# Altium PCB Pixy2Carrier.PcbDoc
Units mil, origin at the board's own origin, x right, y up, seen from the top; angles counter-clockwise.
Board outline 1680 x 2175.5 mil, 2 copper layers (Top Layer, Bottom Layer), stack 62.8 mil thick; 16 components, 16 nets, 75 pads, 4 vias.
Unrouted connection lines stored in the file: 1.
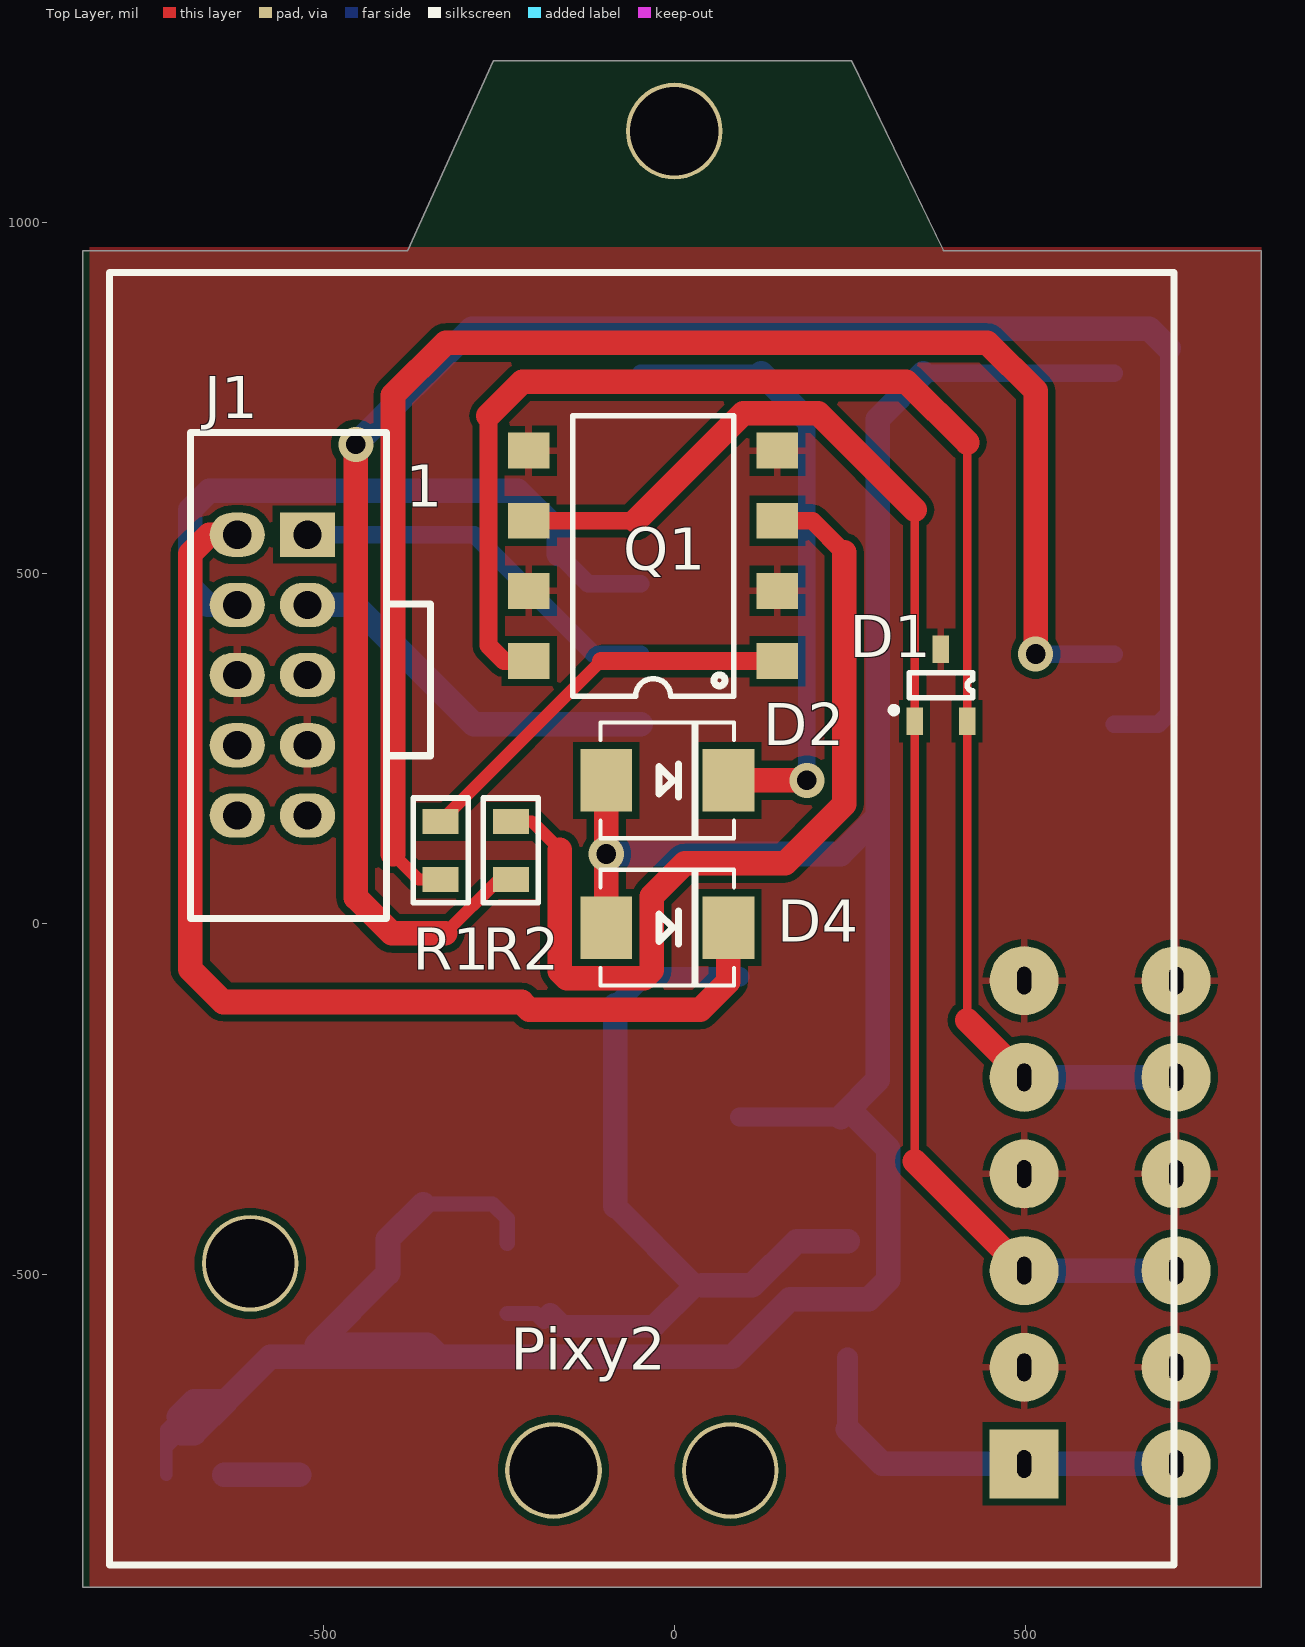
[diagram p0: Top Layer view]
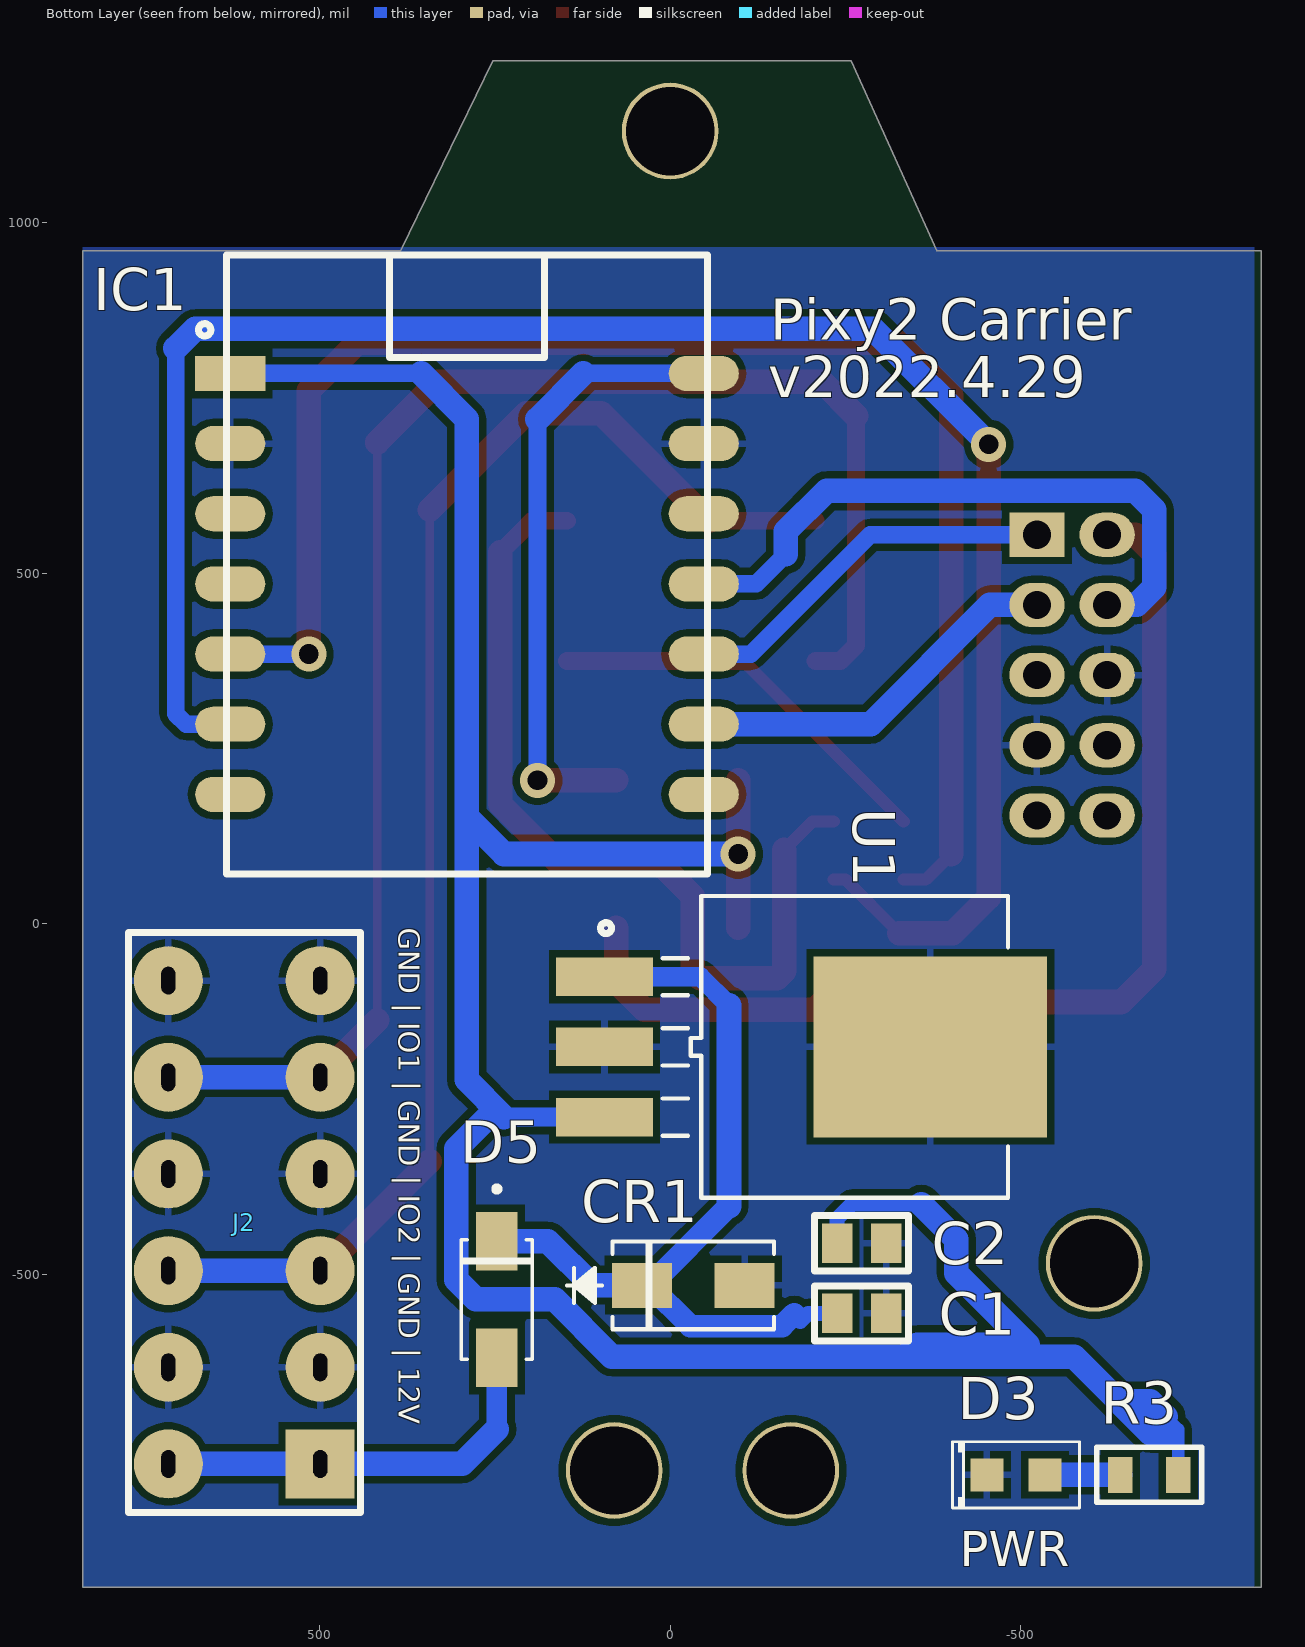
[diagram p1: Bottom Layer view, seen from below]
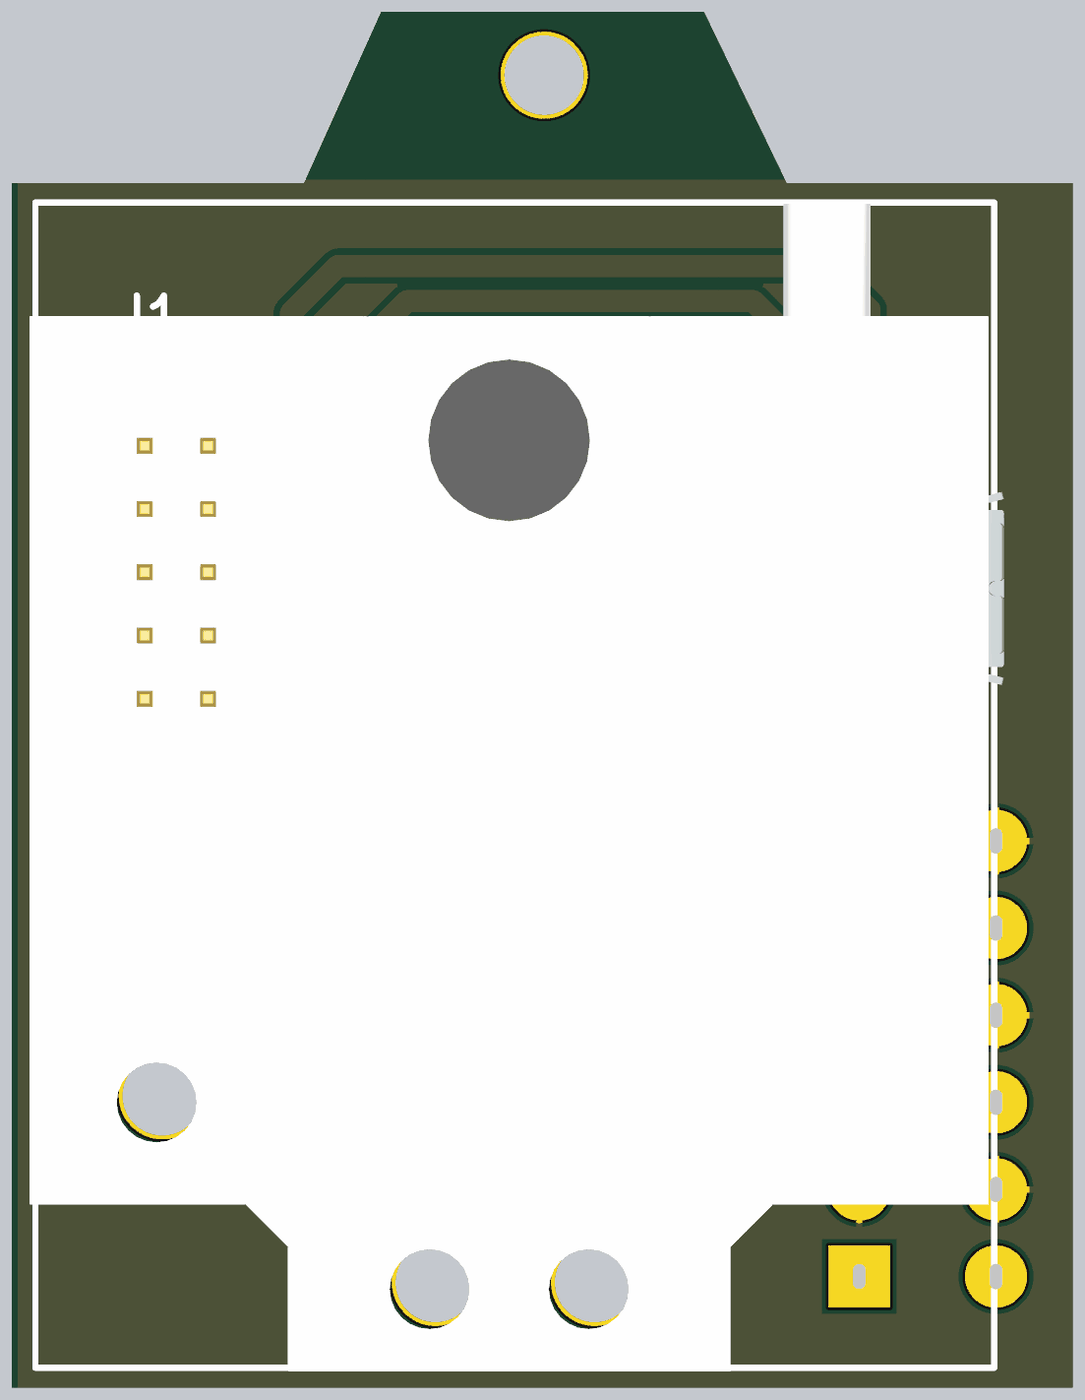
[diagram p2: 3D render of the assembled board from above, using the file's embedded part models]
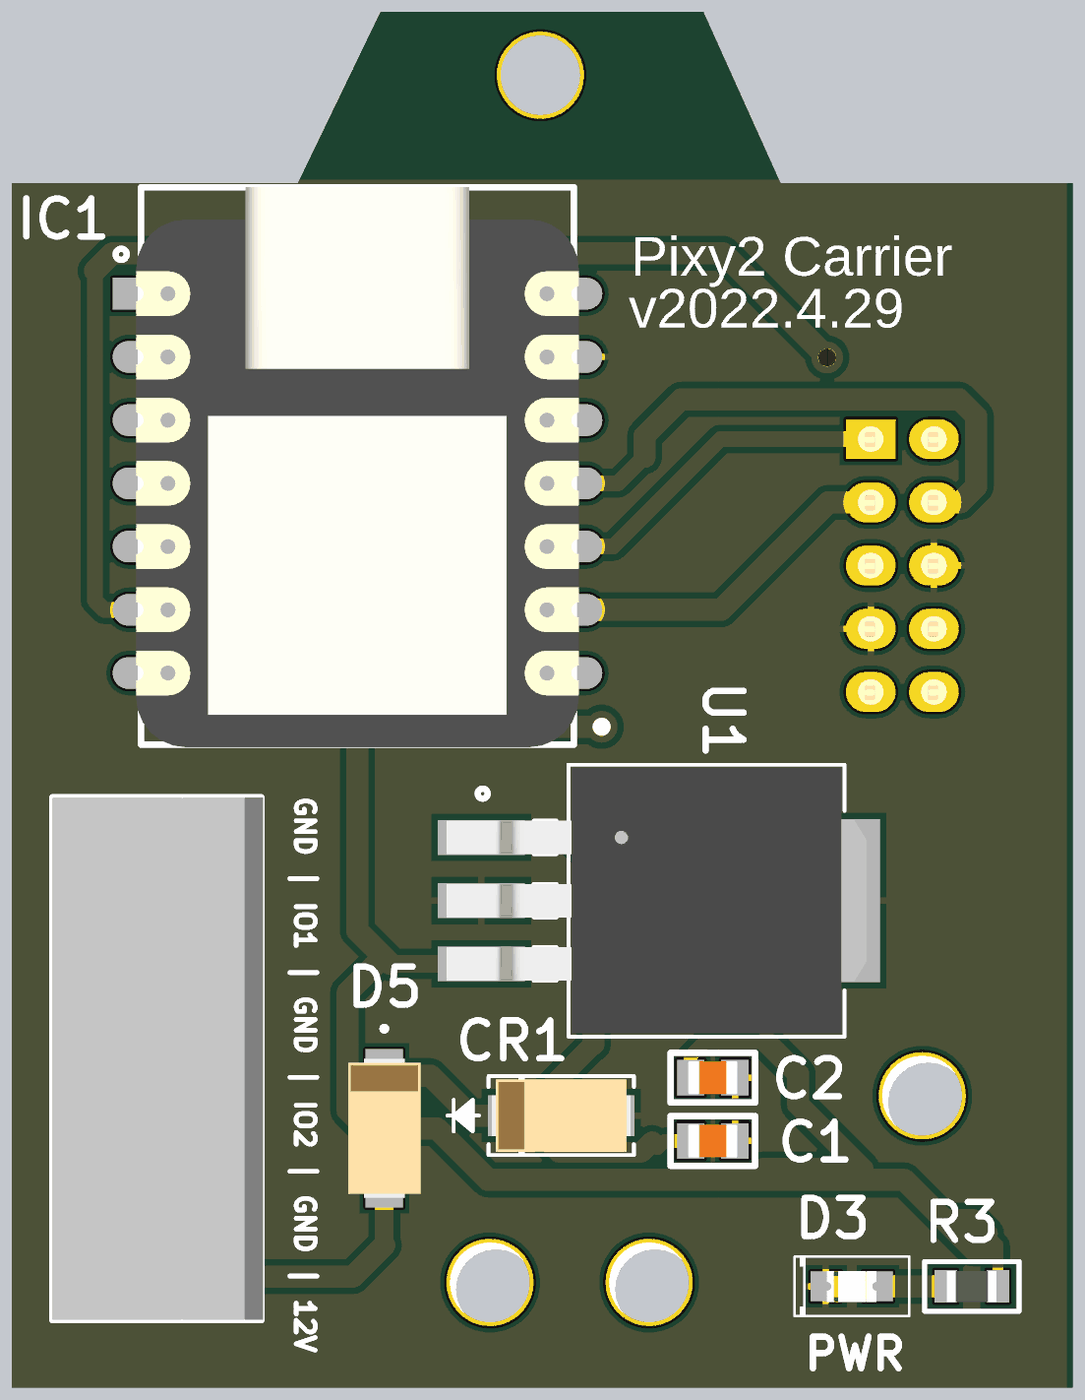
[diagram p3: 3D render of the assembled board from below, using the file's embedded part models]

## Layer stack, top to bottom
Top Solder: solder mask 1, Solder Resist, Dk 3.5
Top Layer: signal copper 1.4
Dielectric 1: dielectric 60, FR-4, Dk 4.8
Bottom Layer: signal copper 1.4
Bottom Solder: solder mask 1, Solder Resist, Dk 3.5

## Board outline
-380,959.5 -258.04,1230 253.04,1230 383.72,959.5 837,959.5 837,-945.5 -843,-945.5 -843,959.5

## Design rules (kind name [scope] priority, off if disabled: settings)
Clearance [All] p1: gap=10 ignorepadtopadclearanceinfootprint=FALSE except(0: Arc-Hole Track-Hole SMDPad-Hole THPad-Hole Via-Hole Fill-Hole Poly-Hole Region-Hole Text-Hole)
PolygonConnect [All] p1: connectstyle=Relief reliefconductorwidth=10 reliefentries=4 polygonreliefangle="90 Angle" airgapwidth=10
RoomDefinition Pixy2Carrier [InComponentClass('Pixy2Carrier')] p1: confinementstyle=ConfineIn formatcopy=TRUE lockcomponents=FALSE outline -833,-955.5 837,-955.5 837,964.5 -833,964.5
RoutingVias [All] p1: holewidth=28 width=50 viastyle="Through Hole" minholewidth=28 minwidth=50 maxholewidth=28 maxwidth=50
SMDNeckDown [All] p1: percent=50.000
SolderMaskExpansion [All] p1: expansion=4 istentingtop=FALSE
Width [All] p1: maxlimit=50 minlimit=10 preferedwidth=35 minimp=50.000000 maximp=50.000000 favimp=50.000000
30 further rules are at their usual default settings.

## Components (designator, comment, footprint, x,y, rotation, side; value= is the part's Value field where it differs from the comment)
C1 "CL21A106KOQNNNG" CAPC2012X140N -273,-555.5 r180 bottom
C2 "CL21A106KOQNNNG" CAPC2012X140N -273,-455.5 r180 bottom
CR1 "SMAZ15-13-F" SMA_DIO -33,-515.5 r180 bottom
D1 "D1213A-02SOL-7" SOT23-3 380,340 r180 top
D2 "LSM115JE3/TR13" DO-214BA_MCH -10,204.5 r180 top
D3 "LTST-C171KGKT" DIOC200X125X110 -493,-785.5 r180 bottom
D4 "LSM115JE3/TR13" DO-214BA_MCH -10,-5.5 r180 top
D5 "SK34A" DIOM4325X250N 247,-535.5 r270 bottom
IC1 "ADAFRUITQTPYSAMD21" ADAFRUITQTPYSAMD21 289.5,484.5 r180 bottom
J1 "PIXY2" PIXY2 -523,554.5 r0 top locked
J2 "AST2130602" AST2130602 607,-425.5 r0 bottom
Q1 "LTV-827S-TA1" LTV-827S-TA1 147,374.5 r180 top
R1 "100" RMCF0805FT -333,104.5 r90 top
R2 "100" RMCF0805FT -233,104.5 r90 top
R3 "150" RMCF0805FT -683,-785.5 r180 bottom
U1 "MIC29310-5.0WU" TO-263-3_MCL -263,-175.5 r270 bottom

## Footprints (in the part's own frame and the unit in brackets; to place one, negate y for a bottom-side part, rotate by r counter-clockwise, add the part's x,y. Pads: shape width x height; smd on the part's side, far side on the other; paste and mask are expansions set on the pad)
ADAFRUITQTPYSAMD21 [mil]
  rect 100x50 smd: 1(-337.5,300)
  oval 100x50 smd: 2(-337.5,200) 3(-337.5,100) 4(-337.5,0) 5(-337.5,-100) 6(-337.5,-200) 7(-337.5,-300) 8(337.5,-300) 9(337.5,-200) 10(337.5,-100) 11(337.5,0) 12(337.5,100) 13(337.5,200) 14(337.5,300)
  silkscreen extent -383,-413 343,469, body extent -350,-417 350,469, height 169
AST2130602 [mm]
  rect 2.5x2.5 hole 0.509 slot 1 at 90 deg: 1(-2.75,8.75)
  round 2.5 hole 0.509 slot 1 at 90 deg: 1(2.75,8.75) 2(-2.75,5.25) 2(2.75,5.25) 3(-2.75,1.75) 3(2.75,1.75) 4(-2.75,-1.75) 4(2.75,-1.75) 5(-2.75,-5.25) 5(2.75,-5.25) 6(-2.75,-8.75) 6(2.75,-8.75)
  silkscreen extent -4.2,-10.5 4.2,10.5, body extent -4.28,-10.5 4.22,10.5, height 14.21
CAPC2012X140N [mm]
  rect 1.1x1.43 smd: 1(-0.888,0) 2(0.888,0)
  silkscreen extent -1.7,-1 1.7,1, body extent -1,-0.67 1,0.67, height 1.26
DIOC200X125X110 [mm]
  rect 1.2x1.2 smd: NEG(-1.05,0) POS(1.05,0)
  silkscreen extent -2.3,-1.2 2.3,1.2, body extent -1,-0.63 1,0.63, height 0.9
DIOM4325X250N [mm]
  rect 2.12x1.5 smd: A(2.115,0) C(-2.115,0)
  silkscreen extent -4.1,-1.28 2.16,1.28, body extent -2.8,-1.46 2.8,1.46, height 2.35
DO-214BA_MCH [mil]
  rect 74x89 smd paste+0 mask+0: 1(-87,0) 2(87,0)
  silkscreen extent -95,-83 95,83, body extent -103,-51 103,51, height 117
LTV-827S-TA1 [mm]
  rect 1.5x1.3 smd: 1(0,0) 2(0,-2.54) 3(0,-5.08) 4(0,-7.62) 5(9,-7.62) 6(9,-5.08) 7(9,-2.54) 8(9,0)
  silkscreen extent 1.59,-8.89 7.42,1.27, body extent -0.53,-8.68 9.52,1.06, height 4.26
PIXY2 [mm]
  rect 2x1.6 hole 1.02: 1(0,0)
  oval 2x1.6 hole 1.02: 2(-2.54,0) 3(0,-2.54) 4(-2.54,-2.54) 5(0,-5.08) 6(-2.54,-5.08) 7(0,-7.62) 8(-2.54,-7.62) 9(0,-10.16) 10(-2.54,-10.16)
  round 3.5 hole 3.2: 11(-2.07,-26.38) 12(8.91,-33.88) 13(15.31,-33.88)
  silkscreen extent -7.17,-37.3 31.38,9.5, body extent -7.4,-37.45 31.77,9.45, height 15.31
RMCF0805FT [mm]
  rect 0.9x1.3 smd: 1(-1.05,0) 2(1.05,0)
  silkscreen extent -1.9,-1 1.9,1, body extent -1,-0.63 1,0.63, height 0.66
SMA_DIO [mm]
  rect 2.18x1.63 smd paste+0 mask+0: 1(-1.857,0) 2(1.857,0)
  silkscreen extent -4.57,-1.59 2.92,1.59, body extent -2.8,-1.46 2.8,1.46, height 2.35
SOT23-3 [mm] "SOT23-3"
  rect 0.6x1 smd: 1(0.95,1.3) 2(-0.95,1.3) 3(0,-1.3)
  silkscreen extent -1.15,-0.45 1.8,1, body extent -1.45,-1.4 1.45,1.4, height 1.3
TO-263-3_MCL [mil]
  rect 55x138 smd paste+0 mask+0: 1(-100,-356.5) 2(0,-356.5) 3(100,-356.5)
  rect 258x333 smd paste+0 mask+0: 4(0,108)
  silkscreen extent -215,-362 215,219, body extent -210,-411 210,254, height 181

## Part data
C1 C2: "10ÂµF Â±10% 16V Ceramic Capacitor X5R 0805 _2012 Metric_", Package="0805 Samsung", Digi-Key_Part_Number=1276-6455-1-ND, Digi-Key_Purchase_URL=https://www.digikey.com/product-detail/en/samsung-electro-mechanics/CL21A106KOQNNNG/1276-6455-1-ND/5958083?utm_source=snapeda&utm_medium=aggregator&utm_campaign=symbol, MF="Samsung Electro-Mechanics", MP=CL21A106KOQNNNG, SnapEDA_Link=https://www.snapeda.com/parts/CL21A106KOQNNNG/Samsung%20Electro-Mechanics/view-part/3597829/?ref=snap
CR1: "No Description Available", Mfr_Name="Diodes Inc", Copyright="Copyright (C) 2022 Ultra Librarian. All rights reserved.", Digi-Key_Part_Number_1=SMAZ15-FDICT-ND, Digi-Key_Part_Number_2=SMAZ15-FDIDKR-ND, Digi-Key_Part_Number_3=SMAZ15-FDITR-ND, Manufacturer_Part_Number=SMAZ15-13-F, RefDes=RefDes, Type=DEV
D1: "2 Channel 6 V 0.85 pF Surface Mount TVS Diode Array - SOT-23", Breakdown Voltage=6V, Capacitance=1.2pF, Case/Package=SOT-23, Clamping Voltage=10V, Leakage Current=1uA, Manufacturer=Diodes, Max Operating Temperature=150°C, Max Power Dissipation=300mW, Max Surge Current=5A, Min Operating Temperature=-65°C, Package Quantity=3000, Peak Pulse Current=1A, Power Line Protection=Yes, Reverse Standoff Voltage=3.3V, Supplier Part Number 1=D1213A-02SOL-7DITR-ND, Test Current=1mA, Category="TVS Diodes", ComponentLink1Description=https://datasheet.ciiva.com/12326/d1213a-02sol-219080-12326802.pdf?src-supplier=Mouser, ComponentLink1URL=https://datasheet.ciiva.com/12326/d1213a-02sol-219080-12326802.pdf?src-supplier=Mouser, ComponentLink2Description=https://datasheet.ciiva.com/6574/d1213a-02sol-6574184.pdf?src-supplier=Digi-Key, ComponentLink2URL=https://datasheet.ciiva.com/6574/d1213a-02sol-6574184.pdf?src-supplier=Digi-Key, ComponentLink3Description=https://datasheet.ciiva.com/15186/getdatasheetpartid-670825-15186721.pdf?src-supplier=Verical, ComponentLink3URL=https://datasheet.ciiva.com/15186/getdatasheetpartid-670825-15186721.pdf?src-supplier=Verical, ComponentLink4Description=https://datasheet.ciiva.com/30478/0900766b8115c333-30478825.pdf?src-supplier=RSComponents, ComponentLink4URL=https://datasheet.ciiva.com/30478/0900766b8115c333-30478825.pdf?src-supplier=RSComponents, Contact Plating=Tin,Matte, Depth=1.3mm, Direction=Unidirectional, Element Configuration=Dual, ESD Protection=Yes, Height=1.1mm, Lead Free="Lead Free", Length=2.9mm, Manufacturer Part Number=D1213A-02SOL-7, Max Reverse Leakage Current=1uA, Min Breakdown Voltage=6V, Mount="Surface Mount", Number of Bidirectional Channels=2, Number of Channels=2, Number of Pins=3, Packaging="Tape and Reel", Polarity=Unidirectional, Pricing 1="3000=0.08910, 6000=0.08415, 15000=0.07673, 30000=0.07515 (USD)", Radiation Hardening=No, REACH SVHC="No SVHC", RoHS=Yes, Series=-, Stock 1=50803, Supplier 1=Digi-Key, Termination=SMD/SMT, Width=1.4mm, Working Voltage=3.3V
D2 D4: "No Description Available", Mfr_Name=Microchip, Copyright="Copyright (C) 2022 Ultra Librarian. All rights reserved.", Digi-Key_Part_Number_1=LSM115JE3/TR13TR-ND, Digi-Key_Part_Number_2=LSM115JE3/TR13CT-ND, Digi-Key_Part_Number_3=LSM115JE3/TR13DKR-ND, Manufacturer_Part_Number=LSM115JE3/TR13, RefDes=RefDes, Type=DEV
D3: "Green 2 x 1.25 x 1.1 mm 130Â° Water Clear 35 mcd 2 V Surface Mount LED", Package=None, Availability=Unavailable, MF="{'manufacturer': u'Lite-On Inc.'}", MP=LTST-C171KGKT, Price=None
D5: Package=None, Availability=Unavailable, MP=SK34A, Price=None
J1: "Female, 5 C, Straight, .100\"CC; 3.20mm Tail, No Mounting; PBT, Phos. Bronze, 105 C", Color=Black, Manufacturer=Sullins, Manufacturer Part Number=PPPC051LFBN-RC, Package Quantity=1000, Supplier Part Number 1=S9194-ND, Category=Connectors, ComponentLink1Description=https://media.digikey.com/pdf/Data%20Sheets/Sullins%20PDFs/Female_Headers.100_DS.pdf?src-supplier=Digi-Key, ComponentLink1URL=https://media.digikey.com/pdf/Data%20Sheets/Sullins%20PDFs/Female_Headers.100_DS.pdf?src-supplier=Digi-Key, ComponentLink2Description=http://www.sullinscorp.com/catalogs/78_Page80-81_HEADER_.100_2.54mm_FEMALE.pdf?src-supplier=Future+Electronics, ComponentLink2URL=http://www.sullinscorp.com/catalogs/78_Page80-81_HEADER_.100_2.54mm_FEMALE.pdf?src-supplier=Future+Electronics, Connector Type=Header, Contact Material=Bronze, Contact Plating=Gold, Contact Type="Female Socket", Height=8.5mm, Housing Material=Plastic, Lead Free="Lead Free", Length=13.2mm, Mount="Through Hole", Number of Positions=5, Number of Rows=1, Packaging=Bulk, Pitch=0.1inch, Pricing 1="1=0.49000, 10=0.42700, 80=0.35188, 440=0.30600, 1000=0.25245, 5000=0.22185, 10000=0.22100 (USD)", RoHS=Yes, RoHS Compliant=Yes, Stock 1=84206, Supplier 1=Digi-Key, Termination=Solder, Width=2.5mm
J2: "Conn PC Terminal Block 6 POS 3.5mm Solder ST Thru-Hole 6A/Contact Box/Carton", Contact Current Rating=6A, Manufacturer="METZ CONNECT USA Inc.", Supplier Part Number 1=1849-1039-ND, Approvals=UL, Category="Terminal Blocks", ComponentLink1Description=https://www.digikey.com/en/products/detail/metz-connect-usa-inc/AST2130602/7794804, ComponentLink1URL=https://www.digikey.com/en/products/detail/metz-connect-usa-inc/AST2130602/7794804, Connector Type=Receptacle,Connector, Contact Plating=Tin,Lead, Lead Free="Lead Free", Manufacturer Part Number=AST2130602, Number of Pins=6, Packaging=Box, Pricing 1="1=1.42000, 10=1.00100, 25=0.93320, 50=0.84700, 100=0.84320, 250=0.71200, 500=0.67454, 1000=0.59959, 5000=0.49966 (USD)", RoHS=No, Sealable="No (Without)", Stock 1=4797, Supplier 1=Digi-Key, Termination="Through Hole", Wire/Cable Gauge=14AWG
Q1: "LTV Series Dual Channel 35 V 5000 Vrms Transistor Output Optocoupler SMT - DIP-8", Case/Package=SMD/SMT, Collector Emitter Saturation Voltage=200mV, Collector Emitter Voltage (VCEO)=35V, Current Transfer Ratio=600%, Forward Current=50mA, Forward Voltage=1.4V, Isolation Voltage=5kV, Manufacturer="Vishay Lite-On", Max Operating Temperature=110°C, Max Power Dissipation=200mW, Min Operating Temperature=-30°C, Package Quantity=1000, Reverse Breakdown Voltage=6V, Supplier Part Number 1=160-2040-1-ND, Category=Optocouplers, Collector-emitter Voltage-Max=200mV, ComponentLink1Description=https://datasheet.ciiva.com/15119/getdatasheetpartid-293602-15119006.pdf?src-supplier=Verical, ComponentLink1URL=https://datasheet.ciiva.com/15119/getdatasheetpartid-293602-15119006.pdf?src-supplier=Verical, ComponentLink2Description=https://datasheet.ciiva.com/6578/s-110-ltv-817827847m-s-s-ta-s-ta1-s-tpseries-6578486.pdf?src-supplier=Digi-Key, ComponentLink2URL=https://datasheet.ciiva.com/6578/s-110-ltv-817827847m-s-s-ta-s-ta1-s-tpseries-6578486.pdf?src-supplier=Digi-Key, ComponentLink3Description=https://datasheet.ciiva.com/6578/s-110-ltv-817827847m-s-s-ta-s-ta1-s-tpseries-6578487.pdf?src-supplier=Digi-Key, ComponentLink3URL=https://datasheet.ciiva.com/6578/s-110-ltv-817827847m-s-s-ta-s-ta1-s-tpseries-6578487.pdf?src-supplier=Digi-Key, ComponentLink4Description=https://datasheet.ciiva.com/6578/s-110-ltv-817827847m-s-s-ta-s-ta1-s-tpseries-6578488.pdf?src-supplier=Digi-Key, ComponentLink4URL=https://datasheet.ciiva.com/6578/s-110-ltv-817827847m-s-s-ta-s-ta1-s-tpseries-6578488.pdf?src-supplier=Digi-Key, ComponentLink5Description=https://datasheet.ciiva.com/12241/ltv-817-827-847-12241821.pdf?src-supplier=Mouser, ComponentLink5URL=https://datasheet.ciiva.com/12241/ltv-817-827-847-12241821.pdf?src-supplier=Mouser, ComponentLink6Description=https://datasheet.ciiva.com/16448/ltv-817-827-847-16448540.pdf?src-supplier=Future+Electronics, ComponentLink6URL=https://datasheet.ciiva.com/16448/ltv-817-827-847-16448540.pdf?src-supplier=Future+Electronics, Fall Time=18000ns, Input Type=DC, Isolation Voltage-Max=5kV, Lead Free="Lead Free", Manufacturer Part Number=LTV-827S-TA1, Max Collector Current=50mA, Max Input Current=50mA, Max Output Voltage=35V, Mount="Surface Mount", Number of Channels=2, Number of Circuits=2, Number of Elements=2, Number of Pins=8, Output Current per Channel=50mA, Output Voltage=35V, Packaging="Tape and Reel", Power Dissipation=200mW, Pricing 1="1=0.54000, 10=0.35400, 100=0.23440 (USD)", Radiation Hardening=No, Rise Time=18000ns, RoHS=Yes, RoHS Compliant=Yes, Series=-, Stock 1=113, Supplier 1=Digi-Key
R1 R2: library part RMCF0805FT100R, "Res Thick Film 0805 100 Ohm 1% 0.125W ±100ppm/°C Molded SMD Paper T/R", Case Code (Imperial)=0805, Case Code (Metric)=2012, Manufacturer="Stackpole Electronics", Max Operating Temperature=155°C, Max Power Dissipation=125mW, Min Operating Temperature=-55°C, Power Rating=250mW, Resistance=100R, Resistor Type="Thick Film", Supplier Part Number 1=RMCF0805FT100RCT-ND, Temperature Coefficient=100ppm/°C, Tolerance=1%, Case/Package=0805, Category="Chip SMD Resistors", ComponentLink1Description=http://components.arrow.com/part/dataview/44988339S7171742N1174?src-supplier=Arrow+Electronics, ComponentLink1URL=http://components.arrow.com/part/dataview/44988339S7171742N1174?src-supplier=Arrow+Electronics, ComponentLink2Description=https://www.seielect.com/catalog/SEI-Packaging.pdf?src-supplier=Digi-Key, ComponentLink2URL=https://www.seielect.com/catalog/SEI-Packaging.pdf?src-supplier=Digi-Key, ComponentLink3Description=https://www.seielect.com/catalog/SEI-RMCF_RMCP.pdf?src-supplier=Avnet, ComponentLink3URL=https://www.seielect.com/catalog/SEI-RMCF_RMCP.pdf?src-supplier=Avnet, ComponentLink4Description=https://www.verical.com/server-webapp/html/getDatasheet?partID=359908&src-supplier=Verical, ComponentLink4URL=https://www.verical.com/server-webapp/html/getDatasheet?partID=359908&src-supplier=Verical, ComponentLink5Description=http://www.seielect.com/Catalog/SEI-RMC.pdf?src-supplier=Future+Electronics, ComponentLink5URL=http://www.seielect.com/Catalog/SEI-RMC.pdf?src-supplier=Future+Electronics, Construction=Rectangular, Contact Plating=Tin,Matte, Depth=1.25mm, Features="Automotive AEC-Q200", Height=0.026inch, Lead Free="Lead Free", Length=2mm, Manufacturer Part Number=RMCF0805FT100R, Military Standard=Not, Mount="Surface Mount", Number of Terminations=2, Packaging="Tape and Reel", Pricing 1="1=0.10000, 10=0.02700, 100=0.01090, 1000=0.00488, 2500=0.00423 (USD)", Radiation Hardening=No, RoHS=Yes, RoHS Compliant=Yes, Series=RMCF, Size Code=0805, Stock 1=188, Supplier 1=Digi-Key, Width=0.049inch
R3: library part RMCF0805FT150R, "Res Thick Film 0805 150 Ohm 1% 0.125W(1/8W) ±100ppm/C Pad SMD Automotive T/R", Case Code (Imperial)=0805, Case Code (Metric)=2012, Manufacturer="Stackpole Electronics", Max Operating Temperature=155°C, Max Power Dissipation=125mW, Min Operating Temperature=-55°C, Resistance=150R, Resistor Type="Thick Film", Temperature Coefficient=100ppm/°C, Tolerance=1%, Case/Package=0805, Category="Chip SMD Resistors", ComponentLink1Description=http://components.arrow.com/part/dataview/44988385S7171757N1174?src-supplier=Arrow+Electronics, ComponentLink1URL=http://components.arrow.com/part/dataview/44988385S7171757N1174?src-supplier=Arrow+Electronics, ComponentLink2Description=https://www.seielect.com/catalog/SEI-Packaging.pdf?src-supplier=Digi-Key, ComponentLink2URL=https://www.seielect.com/catalog/SEI-Packaging.pdf?src-supplier=Digi-Key, ComponentLink3Description=https://www.seielect.com/catalog/SEI-RMCF_RMCP.pdf?src-supplier=Avnet, ComponentLink3URL=https://www.seielect.com/catalog/SEI-RMCF_RMCP.pdf?src-supplier=Avnet, ComponentLink4Description=https://www.seielect.com/catalog/SEI-RMCF_RMCP.pdf?src-supplier=Avnet+Asia, ComponentLink4URL=https://www.seielect.com/catalog/SEI-RMCF_RMCP.pdf?src-supplier=Avnet+Asia, ComponentLink5Description=https://www.verical.com/server-webapp/html/getDatasheet?partID=375102&src-supplier=Verical, ComponentLink5URL=https://www.verical.com/server-webapp/html/getDatasheet?partID=375102&src-supplier=Verical, Construction=Rectangular, Contact Plating=Tin,Matte, Depth=1.25mm, Features="Automotive AEC-Q200", Height=0.026inch, Length=2mm, Manufacturer Part Number=RMCF0805FT150R, Military Standard=Not, Mount="Surface Mount", Number of Terminations=2, Packaging="Tape and Reel", Power Rating=125mW, Pricing 1="5000=0.00256, 10000=0.00252, 20000=0.00245, 30000=0.00239, 40000=0.00230, 50000=0.00225, 500000=0.00220 (USD)", Radiation Hardening=No, RoHS=Yes, RoHS Compliant=Yes, Series=RMCF, Stock 1=315000, Supplier 1=Avnet, Supplier Part Number 1=RMCF0805FT150R, Width=0.049inch
U1: "No Description Available", Mfr_Name=Micrel, Copyright="Copyright (C) 2022 Ultra Librarian. All rights reserved.", Digi-Key_Part_Number_1=576-2230-ND, Digi-Key_Part_Number_2=MIC29310-5.0WU-CRL-ND, Manufacturer_Part_Number=MIC29310-5.0WU, RefDes=RefDes, Type=DEV

## Free pads (board coordinates)
  round 137.8 hole 125.98: ""(0,1130)

## Via types
v1: diameter 50, hole 28, Top Layer to Bottom Layer, tented both sides, 4 vias

## Nets (pads, with @x,y where several pads share a name; then routed paths per layer and width w, separated by ;. In a path a pad name is that pad's centre, name@x,y a point inside that pad or via, vN(x,y) a via of type N, cw(c..) or ccw(c..) an arc to the next point about the centre after c; other vN are vias at no path point)
+5V: C2.1 D2.2 D4.2 IC1.1 R3.2 U1.3 | length 4322.3
  Top Layer w35: D4.2 v1(-97,99.5) D2.2
  Bottom Layer w17.72: R3.2 -724.34,-747.51 ; -706.51,-702.67 -724.34,-720.5 -724.34,-747.51 ; -703,-726.18 -724.34,-747.51
  Bottom Layer w21.65: -358,-399.5 -259.04,-399.5 -238.04,-420.5 C2.1
  Bottom Layer w25: 355,784.5 IC1.1
  Bottom Layer w27.5: U1.3 237,-275.5 260,-275.5
  Bottom Layer w35: -706.51,-702.67 -684.34,-680.5 -639,-680.5 -684.68,-726.18 -703,-726.18 ; -639.37,-680.5 -576.04,-617.17 -334.98,-617.17 ; -358,-399.5 -408.12,-449.62 -408.12,-498.12 -510,-600 -352.15,-600 -334.98,-617.17 ; v1(-97,99.5) 237,99.5 290,152.5 ; 237,-275.5 290,-222.5 290,152.5 ; 260,-275.5 305,-320.5 305,-507.5 277,-535.5 164.5,-535.5 82.83,-617.17 -334.98,-617.17 ; 355,784.5 290,719.5 290,152.5
+12V: D5.A J2.1 | length 590.5
  Bottom Layer w29.53: 247,-720.5 D5.A
  Bottom Layer w35: 247,-720.5 296.49,-769.99 498.73,-769.99 J2.1@715.27,-769.99
GND: C1.2 C2.2 CR1.2 D1.3 D3.NEG IC1.2 IC1.13 J1.6 J1.7 J2.2 J2.4 J2.6 Q1.2 Q1.4 Q1.5 Q1.7 U1.2 U1.4
GPIO1_PROT: D1.2 J2.5 Q1.8 | length 2288.1
  Top Layer w11.81: 417.4,-137.48 D1.2 417.4,686.1
  Top Layer w25.59: -265,724.5 -265,396.5 -243,374.5 Q1.8
  Top Layer w35: -265,724.5 -216.91,772.59 330.91,772.59 417.4,686.1 ; 417.4,-137.48 J2.5@498.73,-218.81
  Bottom Layer w35: J2.5@498.73,-218.81 J2.5@715.27,-218.81
GPIO2_PROT: D1.1 J2.3 Q1.6 | length 2035.9
  Top Layer w11.81: 342.6,-338.26 D1.1 342.6,589.99
  Top Layer w25.59: Q1.6 -55,574.5
  Top Layer w35: -55,574.5 98.09,727.59 205,727.59 342.6,589.99 ; 342.6,-338.26 J2.3@498.73,-494.4
  Bottom Layer w35: J2.3@498.73,-494.4 J2.3@715.27,-494.4
NetC1_1: C1.1 CR1.1 D5.C U1.1 | length 1192.9
  Bottom Layer w21.65: C1.1 -197,-555.5 -185.56,-566.94 -185.56,-565.02 -177,-556.46
  Bottom Layer w27.5: -84,-116.5 -43,-75.5 U1.1
  Bottom Layer w32.09: -177,-556.46 -159.83,-573.63 -28.85,-573.63 29.28,-515.5 CR1.1 ; -84,-402.5 CR1.1@29,-515.5
  Bottom Layer w35: -84,-402.5 -84,-116.5 ; CR1.1 111,-515.5 174.27,-452.23 D5.C
NetD2_1: D2.1 IC1.14 | length 890.9
  Top Layer w35: D2.1 v1(189,204.5)
  Bottom Layer w25: IC1.14 124,784.5 ; v1(189,204.5) 189,719.5
  Bottom Layer w35: 124,784.5 189,719.5
NetD4_1: D4.1 J1.2 | length 1554.8
  Top Layer w35: J1.2 -663,554.5 -690,527.5 -690,-64.5 -643,-111.5 -217.5,-111.5 -206.5,-122.5 37,-122.5 77,-82.5 D4.1
NetIC1_5: IC1.5 R1.1 | length 2199.7
  Top Layer w17.72: -401,99.5 -364.66,63.16 R1.1
  Top Layer w35: -401,99.5 -401,753.5 -326,828.5 446,828.5 515,759.5 v1(515,384.5)
  Bottom Layer w25: v1(515,384.5) IC1.5
NetIC1_6: IC1.6 R2.1 | length 2764
  Top Layer w17.72: -326.66,-13.5 -250,63.16 R2.1
  Top Layer w35: v1(-454,683.5) -454,37.5 -403,-13.5 -326.66,-13.5
  Bottom Layer w25: IC1.6 690,284.5 705,299.5 705,820.5
  Bottom Layer w35: v1(-454,683.5) -289,848.5 677,848.5 705,820.5
NetIC1_9: IC1.9 J1.3 | length 545.4
  Bottom Layer w35: J1.3 -456,454.5 -286,284.5 IC1.9
NetIC1_10: IC1.10 J1.1 | length 545.4
  Bottom Layer w25: J1.1 -285,554.5 -115,384.5 IC1.10
NetIC1_11: IC1.11 J1.4 | length 916
  Bottom Layer w25: -165,526.5 -123,484.5 IC1.11
  Bottom Layer w35: J1.4 -665,454.5 -690,479.5 -690,590.5 -663,617.5 -223,617.5 -165,559.5 -165,526.5
NetQ1_1: Q1.1 R1.2 | length 574.7
  Top Layer w17.72: R1.2 -104.34,374.5
  Top Layer w25.59: -104.34,374.5 Q1.1
NetQ1_3: Q1.3 R2.2 | length 1306.5
  Top Layer w17.72: R2.2 -203,145.84 -163,105.84
  Top Layer w25.59: Q1.3 197,574.5 242,529.5
  Top Layer w35: -163,105.84 -163,-67.5 -153,-77.5 -43,-77.5 -32,-66.5 -32,39.5 15,86.5 158,86.5 242,170.5 242,529.5
PWR_IND: D3.POS R3.1 | length 107.3
  Bottom Layer w35: R3.1 D3.POS
pads on no net: IC1.3 IC1.4 IC1.7 IC1.8 IC1.12 J1.5 J1.8 J1.9 J1.10 J1.11 J1.12 J1.13

## Polygon pours and split planes (outlines as drawn)
GND on Top Layer "GND_L01_P000" (solid, pour order 0): -833,964.5 837,964.5 837,-945.5 -833,-945.5
GND on Bottom Layer "GND_L02_P001" (solid, pour order 1): -833,964.5 837,964.5 837,-945.5 -833,-945.5

## Silkscreen, mask and mechanical layers (free items; w line width, h text height)
Bottom Overlay:
  text "Pixy2 Carrier" at -143,813.3 h100
  text "v2022.4.29" at -140,731.11 h100
  text "GND | IO1 | GND | IO2 | GND | 12V" at 387,-5.5 h30 r90
  text "PWR" at -413,-915.5 h50
Mechanical 15:
  the board outline again, w1

## Text inside footprints (layer, text, board x,y; h text height)
J1: Top Overlay "Pixy2" at -233,-635.51 h60; Top Overlay "1" at -383,594.5 h60